# EAGLE board Solo_transistor (EAGLE 9.2.2)
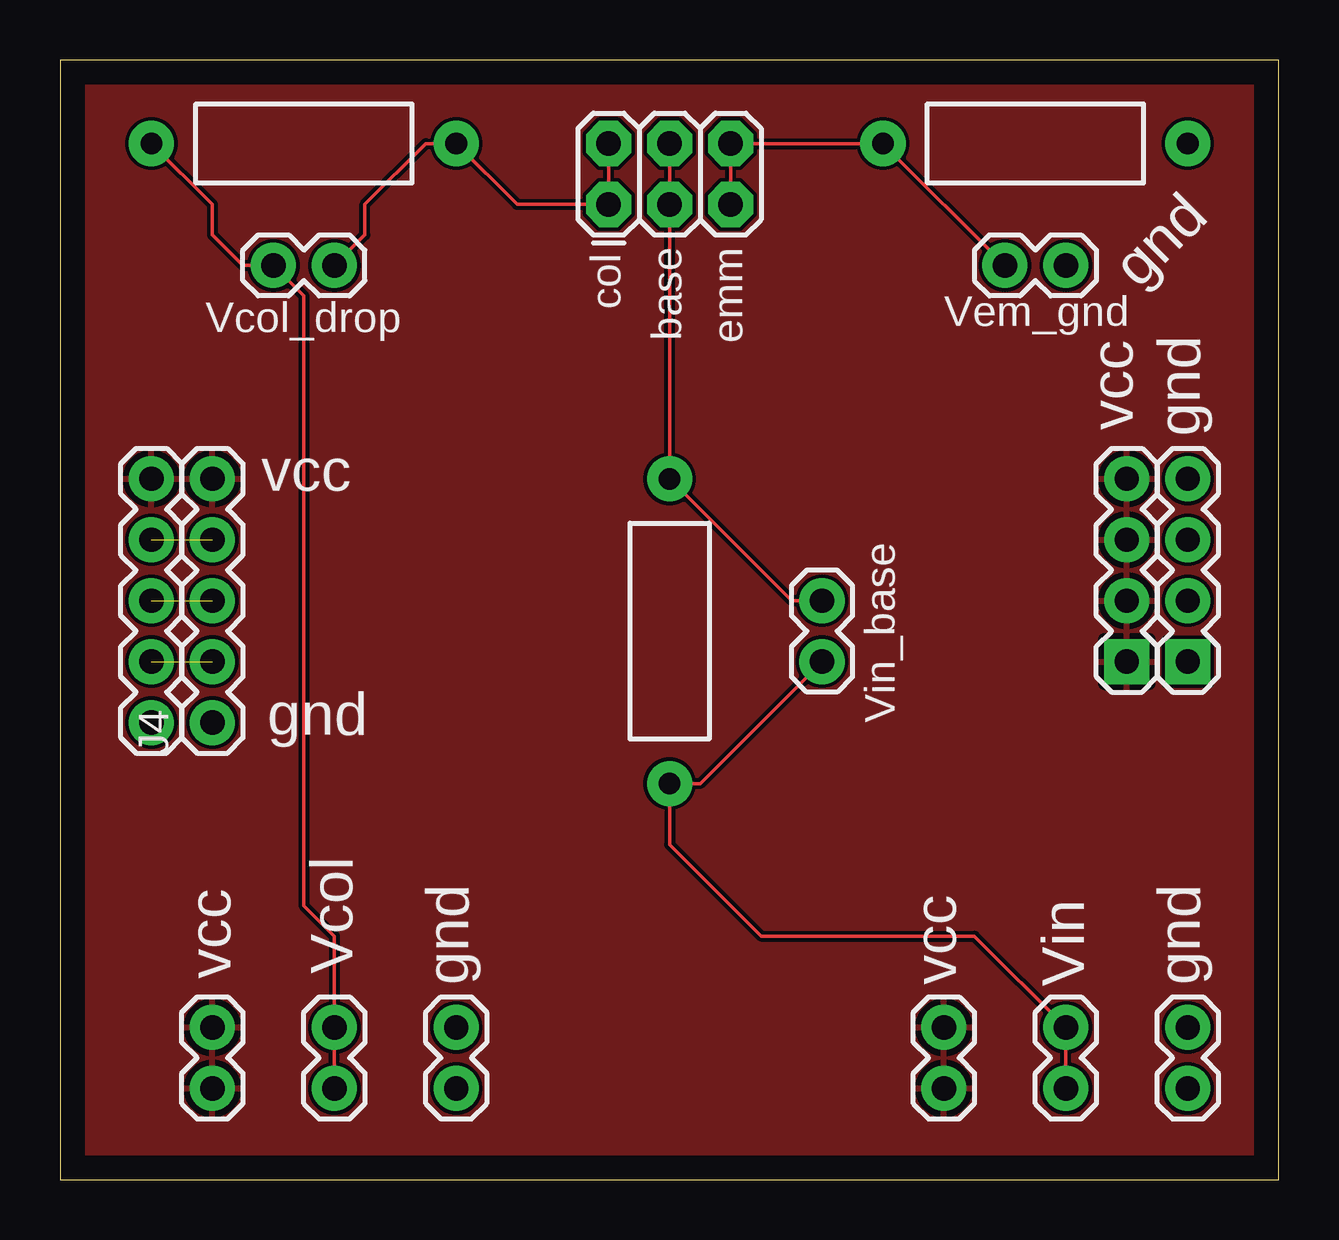
[diagram p0: board, top side]
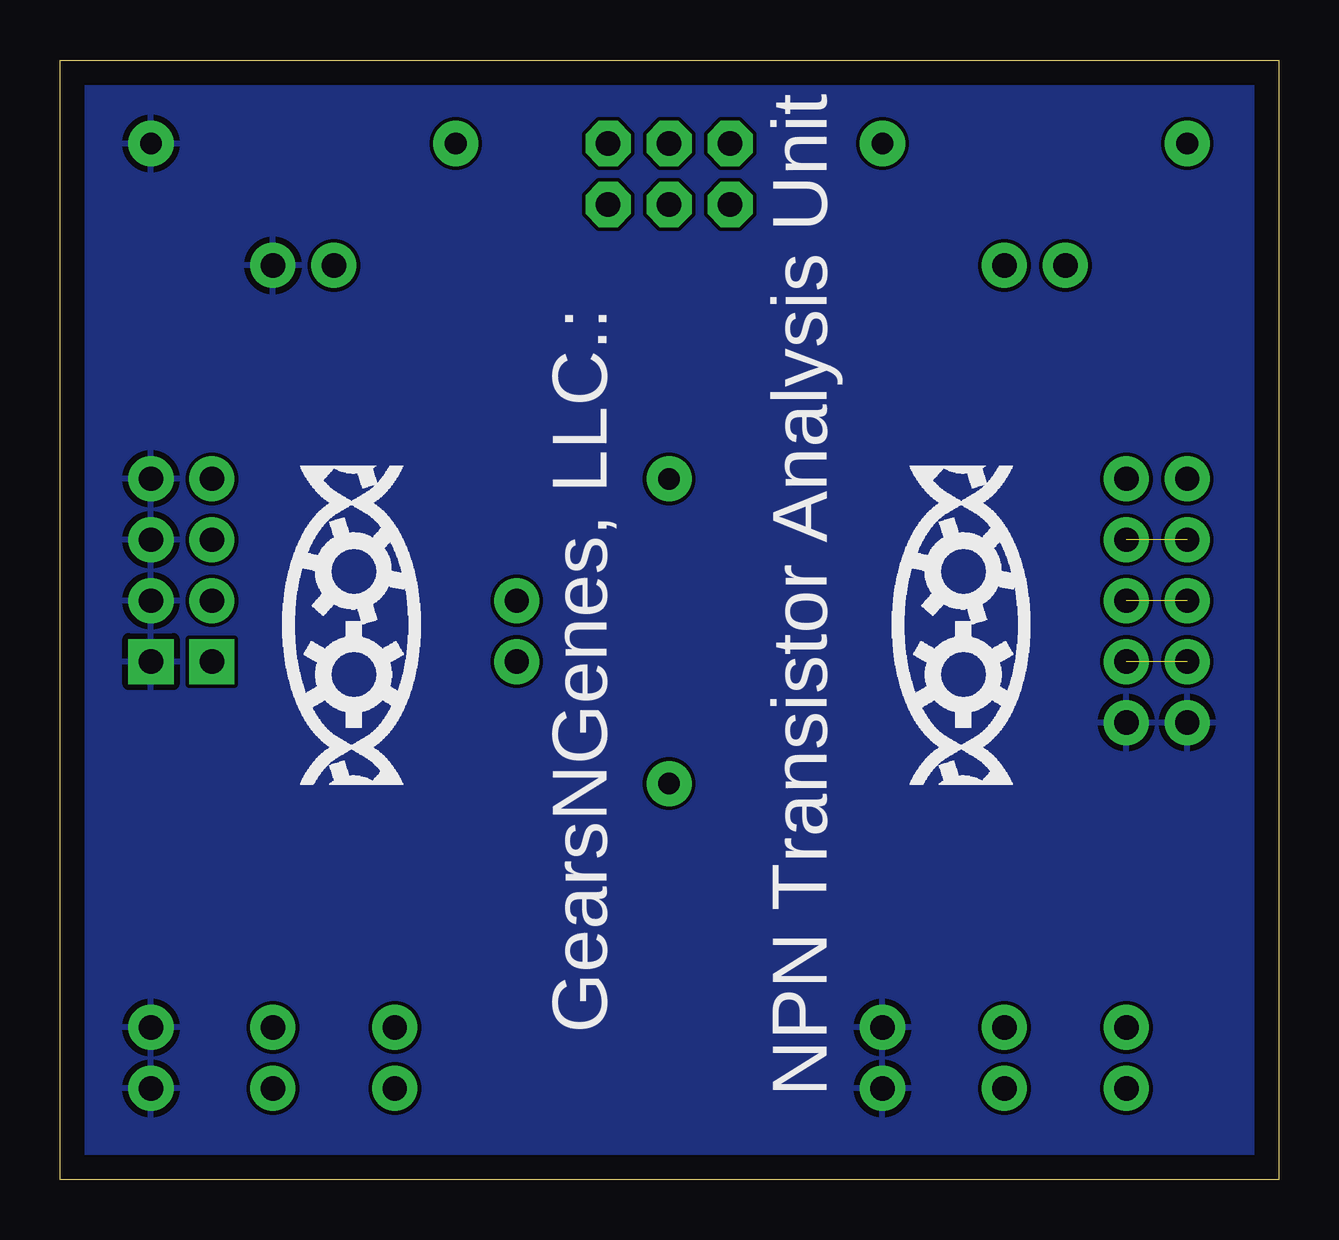
[diagram p1: board, bottom side, seen from below]

Size 50.78 x 46.66 mm. Coordinates in mm from the lower left corner, seen from the top.
Outline: 0,0 50.78,0 50.78,46.66 0,46.66 0,0
Copper layers (1*16): Top 0.035mm / dielectric 1.5mm / Bottom 0.035mm
Design rules "default": minimum track width 6mil, minimum drill 0.35mm, track to track 6mil, track to pad 6mil, pad to pad 6mil, via to via 6mil, smd to smd 6mil, copper to edge 40mil, drill to drill 6mil, minimum pad ring 10mil, minimum via ring 8mil, stop-mask expansion 4mil, vias tented up to drill 0mil, thermal gap 10mil

## Footprints (pad centres in the part's own frame; a part is rotated, then mirrored left to right if it is on the bottom)
1X02 = drill 1.016 pad 1.88: 1 0,0; 2 2.54,0
1X05 = drill 1.016 pad 1.88: 1 0,0; 2 2.54,0; 3 5.08,0; 4 7.62,0; 5 10.16,0
1X04 = drill 1.016 pad 1.88 square: 1 0,0 | drill 1.016 pad 1.88: 2 2.54,0; 3 5.08,0; 4 7.62,0
2X3 = drill 1.016 pad 1.88 octagon: 1 0,0; 2 0,2.54; 3 2.54,0; 4 2.54,2.54; 5 5.08,0; 6 5.08,2.54
AXIAL-0.5 = drill 0.9 pad 1.88: P$1 -6.35,0; P$2 6.35,0

## Placement (x,y rotation side)
J1  [1X02]  36.83,3.81 90 top
J2  [1X02]  41.91,3.81 90 top
J3  [1X02]  46.99,3.81 90 top
J4  [1X05]  6.35,19.05 90 top
J5  [1X05]  3.81,19.05 90 top
J6  [1X02]  6.35,3.81 90 top
J7  [1X02]  11.43,3.81 90 top
J8  [1X04]  44.45,21.59 90 top
J9  [1X04]  46.99,21.59 90 top
J10  [1X02]  16.51,3.81 90 top
J11  [1X02]  11.43,38.1 180 top
J12  [1X02]  39.37,38.1 0 top
J13  [1X02]  31.75,24.13 270 top
JP1  FEMALE 2x3  [2X3]  22.86,40.64 0 top
R1  [AXIAL-0.5]  10.16,43.18 0 top
R2  [AXIAL-0.5]  40.64,43.18 0 top
R3  [AXIAL-0.5]  25.4,22.86 90 top

## Library data of the parts
J1-J7 J10-J13 R1-R3 = MG-Eagle_v1
J8 J9 = MG-Eagle_v1; PROD_ID: CONN-09696
JP1 = MG-Eagle_v1; PROD_ID: CONN-11566

## Nets
GND: J3.1 J3.2 J4.1 J5.1 J9.1 J9.2 J9.3 J9.4 J10.1 J10.2 J12.2 R2.P$2
N$1: J11.1 JP1.1 JP1.2 R1.P$2
N$2: J13.1 JP1.3 JP1.4 R3.P$2
N$3: J12.1 JP1.5 JP1.6 R2.P$1
N$5: J4.4 J5.4
N$6: J4.3 J5.3
N$7: J4.2 J5.2
N$11: J2.1 J2.2 J13.2 R3.P$1
VCC: J1.1 J1.2 J4.5 J5.5 J6.1 J6.2 J8.1 J8.2 J8.3 J8.4
VCOL: J7.1 J7.2 J11.2 R1.P$1

## Tracks (layer width: path | path; a pad name or v marks a point on that pad's centre or on a via)
GND
  pour Bottom: -1.27,48.26 -1.27,-1.27 57.15,-1.27 57.15,48.26
N$1
  Top 0.152: JP1.2 JP1.1 19.05,40.64 R1.P$2 15.24,43.18 12.7,40.64 12.7,39.37 J11.1
N$2
  Top 0.152: JP1.4 JP1.3 R3.P$2 30.48,24.13 J13.1
N$3
  Top 0.152: JP1.5 JP1.6 R2.P$1 J12.1
N$5  (1 unrouted)
N$6  (1 unrouted)
N$7  (1 unrouted)
N$11
  Top 0.152: J13.2 26.67,16.51 R3.P$1 25.4,13.97 29.21,10.16 38.1,10.16 J2.2 J2.1
VCC
  pour Top: -1.27,48.26 53.34,48.26 53.34,-2.54 -1.27,-2.54
VCOL
  Top 0.152: R1.P$1 6.35,40.64 6.35,39.37 7.62,38.1 J11.2 10.16,36.83 10.16,11.43 11.43,10.16 J7.2 J7.1

## Text on the board
tPlace: col | base | emm | gnd | Vcol_drop | Vem_gnd | vcc | gnd | vcc | Vin_base | gnd | Vcol | Vin | vcc | gnd | vcc | gnd
bPlace: NPN Transistor Analysis Unit | GearsNGenes, LLC.: